# Altium PCB PCB1.PcbDoc
Units mm, origin at the board's own origin, x right, y up, seen from the top; angles counter-clockwise.
Board outline 33.5 x 35.78 mm, 2 copper layers (Top Layer, Bottom Layer); 48 components, 15 nets, 227 pads, 57 vias.
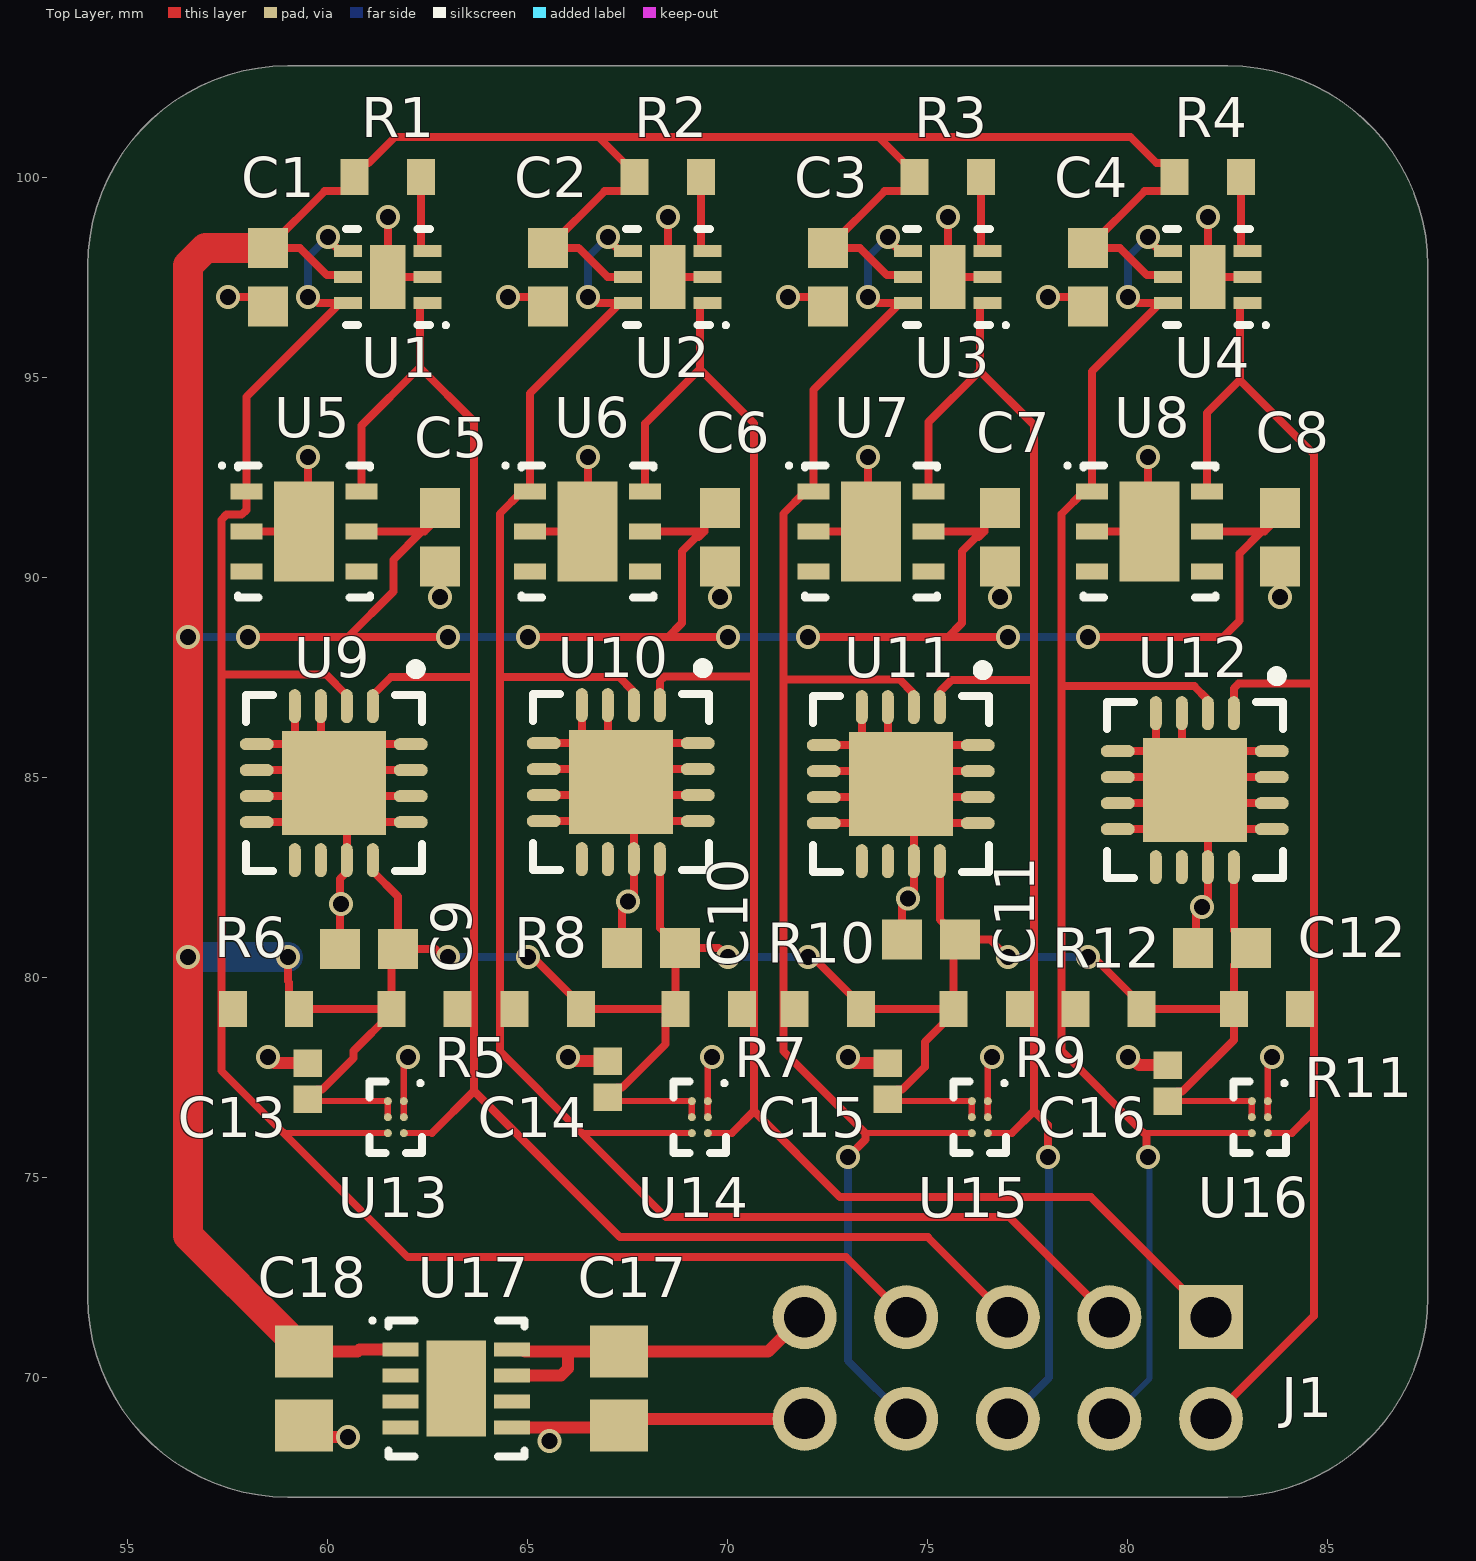
[diagram p0: Top Layer view]
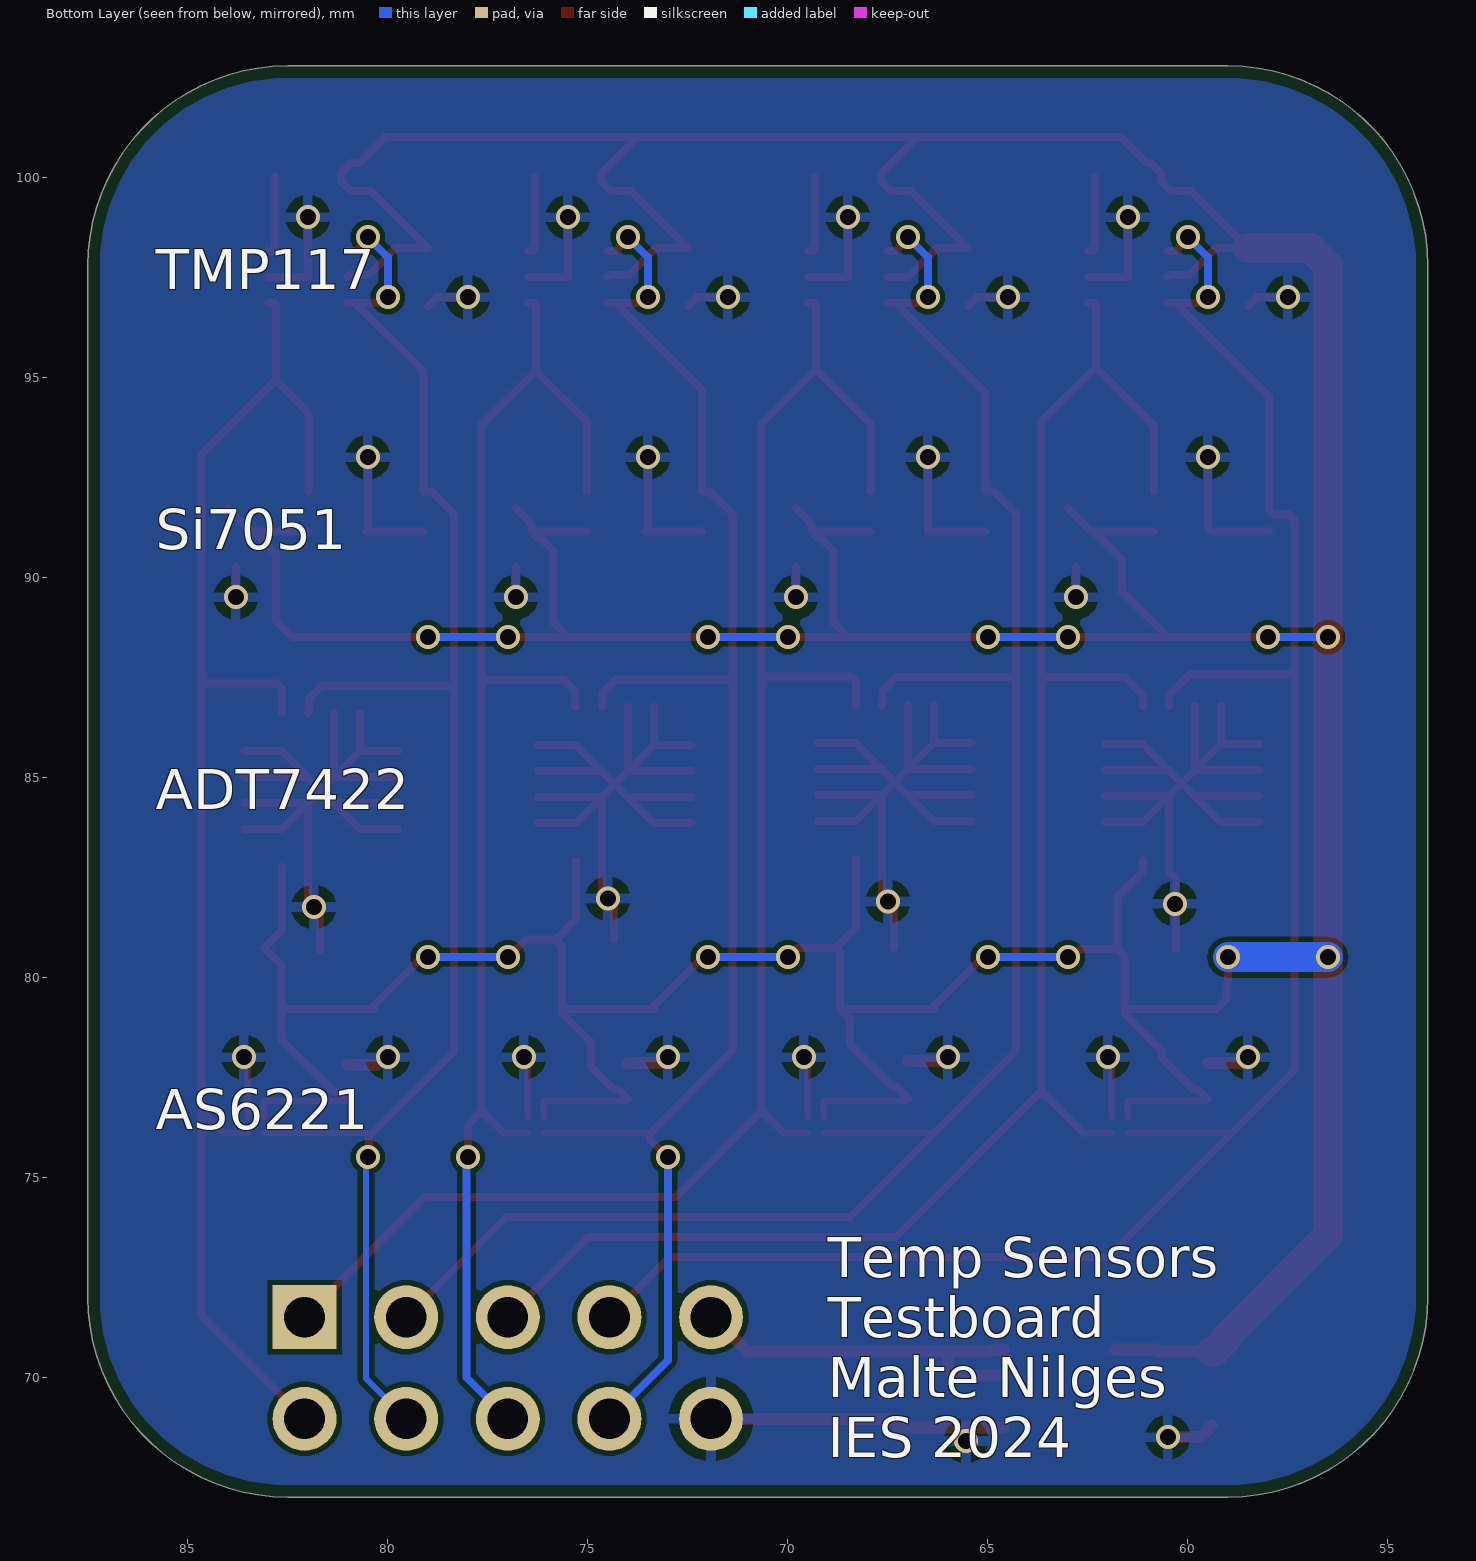
[diagram p1: Bottom Layer view, seen from below]

## Layer stack, top to bottom
Top Solder: solder mask 0.0102, Solder Resist, Dk 3.5
Top Layer: signal copper 0.0356
Dielectric 1: dielectric 0.32, FR-4, Dk 4.8
Bottom Layer: signal copper 0.0356
Bottom Solder: solder mask 0.0102, Solder Resist, Dk 3.5

## Board outline
54,72 54,97.785 cw(c59,97.785) 59,102.785 82.5,102.785 cw(c82.5,97.785) 87.5,97.785 87.5,72 cw(c82.5,72) 82.5,67 59,67 cw(c59,72)

## Design rules (kind name [scope] priority, off if disabled: settings)
BoardOutlineClearance [All] p1: gap=0.3 ignorepadtopadclearanceinfootprint=FALSE
Clearance [All] p1: gap=0.127 ignorepadtopadclearanceinfootprint=FALSE
HoleToHoleClearance [All] p1: gap=0.5 allowstackedmicrovias=TRUE
MinimumSolderMaskSliver [All] p1: minsoldermaskwidth=0.1
PolygonConnect [All] p1: connectstyle=Relief reliefconductorwidth=0.254 reliefentries=4 polygonreliefangle="90 Angle" airgapwidth=0.254
RoutingVias [All] p1: holewidth=0.4 width=0.6 viastyle="Through Hole" minholewidth=0.3 minwidth=0.5 maxholewidth=1 maxwidth=2
SolderMaskExpansion [All] p1: expansion=0.05 istentingtop=FALSE
SupplyNets "Schematic Supply Nets_2" [InNet('GND')] p1: voltage=0.000
SupplyNets "Schematic Supply Nets_1" [InNet('3V3')] p2: voltage=0.000
SupplyNets "Schematic Supply Nets" [InNet('5V')] p3: voltage=0.000
Width [All] p1: maxlimit=2.54 minlimit=0.127 preferedwidth=0.254
28 further rules are at their usual default settings.

## Components (designator, comment, footprint, x,y, rotation, side; value= is the part's Value field where it differs from the comment)
C1 "100nF" CAP_SM0603_YAGEOCC2_N 58.5,97.5 r90 top
C2 "100nF" CAP_SM0603_YAGEOCC2_N 65.5,97.5 r90 top
C3 "100nF" CAP_SM0603_YAGEOCC2_N 72.5,97.5 r90 top
C4 "100nF" CAP_SM0603_YAGEOCC2_N 79,97.5 r90 top
C5 "100nF" CAP_SM0603_YAGEOCC2_N 62.8,91 r90 top
C6 "100nF" CAP_SM0603_YAGEOCC2_N 69.8,91 r90 top
C7 "100nF" CAP_SM0603_YAGEOCC2_N 76.8,91 r90 top
C8 "100nF" CAP_SM0603_YAGEOCC2_N 83.8,91 r90 top
C9 "100nF" CAP_SM0603_YAGEOCC2_N 61.028,80.699 r0 top
C10 "100nF" CAP_SM0603_YAGEOCC2_N 68.076,80.733 r0 top
C11 "100nF" CAP_SM0603_YAGEOCC2_N 75.076,80.938 r0 top
C12 "100nF" CAP_SM0603_YAGEOCC2_N 82.353,80.733 r0 top
C13 "10nF" CAP_SM0402_YAGEOCC2_N 59.5,77.4 r90 top
C14 "10nF" CAP_SM0402_YAGEOCC2_N 67,77.45 r90 top
C15 "10nF" CAP_SM0402_YAGEOCC2_N 74,77.4 r90 top
C16 "10nF" CAP_SM0402_YAGEOCC2_N 81,77.35 r90 top
C17 "1uF" CAP_SM0805_YAGEOCC2_N 67.28,69.714 r90 top
C18 "1uF" CAP_SM0805_YAGEOCC2_N 59.406,69.714 r90 top
J1 "PinHeader_2x5" PinHeader_2x5_2.54mm 82.08,71.5 r270 top
R1 "10K" RES_SM0603_YAGEORC_N 61.5,100 r0 top
R2 "10K" RES_SM0603_YAGEORC_N 68.5,100 r0 top
R3 "10K" RES_SM0603_YAGEORC_N 75.5,100 r0 top
R4 "10K" RES_SM0603_YAGEORC_N 82,100 r0 top
R5 "3K3" RES_SM0603_YAGEORC_N 62.415,79.199 r180 top
R6 "3K3" RES_SM0603_YAGEORC_N 58.454,79.199 r0 top
R7 "3K3" RES_SM0603_YAGEORC_N 69.523,79.199 r180 top
R8 "3K3" RES_SM0603_YAGEORC_N 65.5,79.199 r0 top
R9 "3K3" RES_SM0603_YAGEORC_N 76.472,79.199 r180 top
R10 "3K3" RES_SM0603_YAGEORC_N 72.5,79.199 r0 top
R11 "3K3" RES_SM0603_YAGEORC_N 83.479,79.199 r180 top
R12 "3K3" RES_SM0603_YAGEORC_N 79.521,79.199 r0 top
U1 "TMP117" TMP117(N/M)AIDRV_WSON 61.5,97.5 r180 top
U2 "TMP117" TMP117(N/M)AIDRV_WSON 68.5,97.5 r180 top
U3 "TMP117" TMP117(N/M)AIDRV_WSON 75.5,97.5 r180 top
U4 "TMP117" TMP117(N/M)AIDRV_WSON 82,97.5 r180 top
U5 "SI7051-A20-IMR" SI7050/1/2/3/4/5 59.405,91.139 r0 top
U6 "SI7051-A20-IMR" SI7050/1/2/3/4/5 66.493,91.139 r0 top
U7 "SI7051-A20-IMR" SI7050/1/2/3/4/5 73.581,91.139 r0 top
U8 "SI7051-A20-IMR" SI7050/1/2/3/4/5 80.542,91.139 r0 top
U9 "ADT7422CCPZ-RL7" ADT7422_QFN 60.15,84.85 r270 top
U10 "ADT7422CCPZ-RL7" ADT7422_QFN 67.325,84.875 r270 top
U11 "ADT7422CCPZ-RL7" ADT7422_QFN 74.325,84.825 r270 top
U12 "ADT7422CCPZ-RL7" ADT7422_QFN 81.675,84.675 r270 top
U13 "AS6221" AS6221_BGA 61.7,76.5 r270 top
U14 "AS6221" AS6221_BGA 69.3,76.5 r270 top
U15 "AS6221" AS6221_BGA 76.3,76.5 r270 top
U16 "AS6221" AS6221_BGA 83.3,76.5 r270 top
U17 "TPS78433" TPS784xxxQDRBRQ1_SON 63.216,69.714 r0 top

## Footprints (in the part's own frame and the unit in brackets; to place one, negate y for a bottom-side part, rotate by r counter-clockwise, add the part's x,y. Pads: shape width x height; smd on the part's side, far side on the other; paste and mask are expansions set on the pad)
ADT7422_QFN [mm] "QFN, 16-Leads, Body 4,00x4,00mm, Pitch 0,65mm, Thermal Pad 2,60x2,60mm, IPC Medium Density"
  oval 0.85x0.3 smd: 1(-1.925,0.975) 2(-1.925,0.325) 3(-1.925,-0.325) 4(-1.925,-0.975) 9(1.925,-0.975) 10(1.925,-0.325) 11(1.925,0.325) 12(1.925,0.975)
  oval 0.3x0.85 smd: 5(-0.975,-1.925) 6(-0.325,-1.925) 7(0.325,-1.925) 8(0.975,-1.925) 13(0.975,1.925) 14(0.325,1.925) 15(-0.325,1.925) 16(-0.975,1.925)
  rect 2.6x2.6 smd: 17(0,0)
  silkscreen extent -2.97,-2.2 2.2,2.2, body extent -2.05,-2.05 2.05,2.05, height 0.8
AS6221_BGA [mm] "BGA, 6-Leads, Body 1,02x1,50mmx0,53mm, Pitch 0,40mm"
  round 0.2 smd: A1(-0.4,0.2) A2(0,0.2) A3(0.4,0.2) B1(-0.4,-0.2) B2(0,-0.2) B3(0.4,-0.2)
  silkscreen extent -0.9,-0.66 0.89,0.66, body extent -0.74,-0.51 0.74,0.51, height 0.55
CAP_SM0402_YAGEOCC2_N [mm] "Capacitor, Yageo CC Class2, SM0402, IPC Medium Density"
  rect 0.68x0.72 smd: 1(-0.45,0) 2(0.45,0)
  body extent -0.55,-0.35 0.55,0.35, height 0.6
CAP_SM0603_YAGEOCC2_N [mm] "Capacitor, Yageo CC Class2, SM0603, IPC Medium Density"
  rect 1x1 smd: 1(-0.727,0) 2(0.727,0)
  body extent -0.9,-0.5 0.9,0.5, height 0.9
CAP_SM0805_YAGEOCC2_N [mm] "Capacitor, Yageo CC Class2, SM0805, IPC Medium Density"
  rect 1.3x1.45 smd: 1(-0.927,0) 2(0.927,0)
  body extent -1.1,-0.72 1.1,0.72, height 1.45
PinHeader_2x5_2.54mm [mm]
  rect 1.6x1.6 hole 1.02: 1(0,0)
  round 1.6 hole 1.02: 2(2.54,0) 3(0,-2.54) 4(2.54,-2.54) 5(0,-5.08) 6(2.54,-5.08) 7(0,-7.62) 8(2.54,-7.62) 9(0,-10.16) 10(2.54,-10.16)
RES_SM0603_YAGEORC_N [mm] "Resistor, Yageo RC_L, SM0603, IPC Medium Density"
  rect 0.7x0.9 smd: 1(-0.827,0) 2(0.827,0)
  body extent -0.85,-0.45 0.85,0.45, height 0.55
SI7050/1/2/3/4/5 [mm] "SON, 6-Leads, Body 3,00x3,00mm, Pitch 1,00mm, Thermal Pad 2,50x1,50mm, IPC Medium Density"
  rect 0.8x0.4 smd: 1(-1.44,1) 2(-1.44,0) 3(-1.44,-1) 4(1.44,-1) 5(1.44,0) 6(1.44,1)
  rect 1.5x2.5 smd: 7(0,0)
  silkscreen extent -2.1,-1.65 1.65,1.7, body extent -1.5,-1.5 1.5,1.5, height 0.8
TMP117(N/M)AIDRV_WSON [mm] "SON127P600-8N"
  rect 0.7x0.3 smd: 1(-0.995,0.65) 2(-0.995,0) 3(-0.995,-0.65) 4(0.995,-0.65) 5(0.995,0) 6(0.995,0.65)
  rect 0.89x1.6 smd: 7(0,0)
  silkscreen extent -1.5,-1.2 1.05,1.25, body extent -1.05,-1.05 1.05,1.05, height 0.8
TPS784xxxQDRBRQ1_SON [mm] "SON127P600-8N"
  rect 0.9x0.35 smd: 1(-1.395,0.975) 2(-1.395,0.325) 3(-1.395,-0.325) 4(-1.395,-0.975) 5(1.395,-0.975) 6(1.395,-0.325) 7(1.395,0.325) 8(1.395,0.975)
  rect 1.49x2.4 smd: 9(0,0)
  silkscreen extent -2.15,-1.7 1.7,1.75, body extent -1.55,-1.55 1.55,1.55, height 1

## Part data
C1 C2 C3 C4 C5 C6 C7 C8 C9 C10 C11 C12: library part CC0603KRX7R9BB104, "CAP 100nF SM0603 X7R 50V YAGEO CC2", Manufacturer=Yageo, Package=0603, Supplier Part Number 1=1362556, Tolerance (%)=10, Voltage Rating (Volts)=50, Category=Capacitor, ComponentLink1Description="Manufacturer Website", ComponentLink1URL=http://www.yageo.com, Manufacturer Part Number=CC0603KRX7R9BB104, Supplier 1=Farnell, Supplier 2=Mouser, Supplier Part Number 2=603-CC603KRX7R9BB104
C13 C14 C15 C16: library part CC0402KRX7R9BB103, "CAP 10nF SM0402 X7R 50V YAGEO CC2", Manufacturer=Yageo, Manufacturer Part Number=CC0603KRX7R9BB103, Package=0603, Supplier Part Number 1=3369167, Tolerance (%)=10, Voltage Rating (Volts)=50, Category=Capacitor, ComponentLink1Description="Manufacturer Website", ComponentLink1URL=http://www.yageo.com, Supplier 1=Farnell, Supplier 2=Mouser, Supplier 3=Digi-Key, Supplier Part Number 2=603-CC402KRX7R9BB103, Supplier Part Number 3=311-1349-1-ND
C17 C18: library part CC0805KKX7R8BB105, "CAP 1uF SM0805 X7R 25V YAGEO CC2", Manufacturer=Yageo, Package=0805, Supplier Part Number 1=1458903, Tolerance (%)=10, Voltage Rating (Volts)=25, Category=Capacitor, ComponentLink1Description="Manufacturer Website", ComponentLink1URL=http://www.yageo.com, Manufacturer Part Number=CC0805KKX7R8BB105, Supplier 1=Farnell, Supplier 2=Digi-Key, Supplier 3=Mouser, Supplier Part Number 2=311-1456-1-ND, Supplier Part Number 3=603-CC805KKX7R8BB105
J1: library part PinHeader_2x5_2.54mm, "PinHeader_2x5 2.54mm Pitch"
R1 R2 R3 R4: library part RC0603FR-0710KL, "RES 10K SM0603 YAGEO RC_L", Manufacturer=Yageo, Package=0603, Power (Watts)=0.1, Resistance (Ohms)=10000, Supplier Part Number 1=9238603, Tolerance (%)=1, Category=Resistor, ComponentLink1Description="Manufacturer Website", ComponentLink1URL=http://www.yageo.com, Manufacturer Part Number=RC0603FR-0710KL, Supplier 1=Farnell, Supplier 2=Digi-Key, Supplier Part Number 2=311-10.0KHRCT-ND
R5 R6 R7 R8 R9 R10 R11 R12: library part RC0603FR-073K3L, "RES 3.3K SM0603 YAGEO RC_L", Manufacturer=Yageo, Manufacturer Part Number=RC0603FR-0710KL, Package=0603, Power (Watts)=0.1, Resistance (Ohms)=10000, Supplier Part Number 1=6497630, Supplier Part Number 10=311-3.30KHRCT-ND, Supplier Part Number 11=311-3.30KHRDKR-ND, Supplier Part Number 12=311-3.30KHRTR-ND, Tolerance (%)=1, Category=Resistor, ComponentLink1Description="Manufacturer Website", ComponentLink1URL=http://www.yageo.com, Supplier 1="Future Electronics", Supplier 2=Rs, Supplier 3=Rs, Supplier 4=Rs, Supplier 5=Avnet, Supplier 6="Arrow Electronics", Supplier 7=Farnell, Supplier 8=Farnell, Supplier 9=Mouser, Supplier 10=Digikey, Supplier 11=Digikey, Supplier 12=Digikey, Supplier Part Number 2=1995564, Supplier Part Number 3=1995564P, Supplier Part Number 4=1995563, Supplier Part Number 5=RC0603FR-073K3L, Supplier Part Number 6=RC0603FR-073K3L, Supplier Part Number 7=9238549, Supplier Part Number 8=9238549RL, Supplier Part Number 9=603-RC0603FR-073K3L
U1 U2 U3 U4: library part TMP117NAIDRVR, "TMP117 High-Accuracy, Low-Power, Digital Temperature Sensor, -55°C bis 150°C, 16b 6-WSON (2x2)", Supplier Part Number 1=595-TMP117NAIDRVR, Supplier 1=Mouser, Supplier 2=Digi-Key, Supplier Part Number 2=296-51836-6-ND
U5 U6 U7 U8: "Si7051-A20 Temperature Sensor ±0.1°C maximum accuracy, Digital I2C, -40°C ~ 125°C 14b 6-DFN (3x3)", Supplier Part Number 1=3265013RL, Supplier 1=Farnell, Supplier 2=Mouser, Supplier 3=Digi-Key, Supplier Part Number 2=634-SI7051-A20-IMR, Supplier Part Number 3=336-4764-1-ND
U9 U10 U11 U12: "ADT7422 Temperature Sensor, ±0.1°C Accuracy, 16b, Digital I2C /  -40°C bis 125°C 16-LFCSP-WQ (4x4)", Supplier Part Number 1=584-ADT7422CCPZ-RL7, Supplier 1=Mouser, Supplier 2=Digi-Key, Supplier Part Number 2=505-ADT7422CCPZ-RL7CT-ND
U13 U14 U15 U16: library part AS6221-AWLT-S, "AS6221 Temperature Sensor Digital -40°C ~ 125°C 16b 6-WLCSP (1.5x1.03)", Supplier Part Number 1=985-AS6221-AWLT-S, Supplier 1=Mouser, Supplier 2=Digi-Key, Supplier Part Number 2=4991-AS6221-AWLT-SCT-ND
U17: library part TPS78433QWDRBRQ1, "TPS78433-Q1 3.3V, 300-mA, High-PSRR Low-Dropout Voltage Regulator With High Accuracy and Enable,  8-SON (3x3)", Supplier Part Number 1=595-TPS78433QWDRBRQ1, Supplier 1=Mouser, Supplier 2=Digi-Key, Supplier Part Number 2=296-TPS78433QWDRBRQ1CT-ND

## Via types
v1: diameter 0.6, hole 0.4, Top Layer to Bottom Layer, 57 vias

## Nets (pads, with @x,y where several pads share a name; then routed paths per layer and width w, separated by ;. In a path a pad name is that pad's centre, name@x,y a point inside that pad or via, vN(x,y) a via of type N, cw(c..) or ccw(c..) an arc to the next point about the centre after c; other vN are vias at no path point)
3V3: C1.2 C2.2 C3.2 C4.2 C5.2 C6.2 C7.2 C8.2 C9.2 C10.2 C11.2 C12.2 C13.1 C14.1 C15.1 C16.1 C18.2 R1.1 R2.1 R3.1 R4.1 R5.2 R6.2 R7.2 R8.2 R9.2 R10.2 R11.2 R12.2 U1.5 U2.5 U3.5 U4.5 U5.5 U6.5 U7.5 U8.5 U9.12 U10.12 U11.12 U12.12 U13.B1 U13.B2 U14.B1 U14.B2 U15.B1 U15.B2 U16.B1 U16.B2 U17.1 | length 192.9
  Top Layer w0.152: C13.1 59.55,76.9 U13.B1 U13.B2 ; C14.1@67,76.95 67.05,76.9 U14.B1 U14.B2 ; C15.1 74.05,76.9 U15.B1 U15.B2 ; C16.1 U16.B1 U16.B2
  Top Layer w0.2: v1(58,88.5) 60.5,88.5 ; v1(59,80.5) 59,79.9 59.031,79.869 59.031,79.449 R6.2 R5.2 ; C13.1 59.74,77.19 59.861,77.19 60.646,77.975 60.646,78.157 61.588,79.099 R5.2 ; U1.5 60.455,97.55 59.977,97.55 59.3,98.227 C1.2 59.923,99.65 60.423,99.65 60.673,99.9 R1.1 60.673,100.1 60.923,100.35 61.023,100.35 61.673,101 66.773,101 ; U5.5 62.345,91.139 ; U9.12 61.125,82.65 61.755,82.02 C9.2 ; v1(63,80.5) 62.892,80.5 62.693,80.699 C9.2 ; v1(63,88.5) 60.5,88.5 ; C5.2@63,91.727 62.412,91.139 62.345,91.139 ; v1(65,80.5) 65.077,80.423 65.203,80.423 66.327,79.299 R8.2 R7.2 ; v1(65,88.5) 68.5,88.5 ; C14.1@67,76.95 67,76.98 67.26,77.24 67.361,77.24 68.446,78.325 68.446,78.949 R7.2 ; U2.5 67.495,97.51 66.99,97.51 66.273,98.227 C2.2 66.923,99.65 67.423,99.65 67.673,99.9 R2.1 67.673,100.1 66.773,101 ; U6.5 69.412,91.139 ; U10.12 68.3,81.236 C10.2 ; C6.2 69.412,91.339 69.412,91.139 ; v1(70,80.5) 69.767,80.733 C10.2 ; v1(70,88.5) 68.5,88.5 ; v1(72,80.5) 72.077,80.423 72.203,80.423 73.327,79.299 R10.2 R9.2 ; v1(72,88.5) 75.5,88.5 ; C15.1 74.24,77.19 74.361,77.19 74.925,77.754 74.925,78.379 75.645,79.099 R9.2 ; U3.5 74.455,97.55 73.977,97.55 73.3,98.227 C3.2 73.923,99.65 74.423,99.65 74.673,99.9 R3.1 74.673,100.1 73.773,101 ; U7.5 76.412,91.139 ; U11.12 75.3,81.441 C11.2 ; C7.2 76.412,91.339 76.412,91.139 ; v1(77,80.5) 76.562,80.938 C11.2 ; v1(77,88.5) 75.5,88.5 ; v1(79,80.5) 79.077,80.423 79.224,80.423 80.348,79.299 R12.2 R11.2 ; v1(79,88.5) 82.383,88.5 82.794,88.912 82.794,90.588 83.345,91.139 ; C16.1 81.24,77.14 81.361,77.14 82.652,78.431 R11.2 ; U4.5 80.955,97.55 80.477,97.55 79.8,98.227 C4.2 80.423,99.65 80.923,99.65 81.173,99.9 R4.1 81.173,100.1 80.923,100.35 80.723,100.35 80.073,101 73.773,101 ; U8.5 83.345,91.139 ; U12.12 82.65,81.165 C12.2 ; C12.2 82.652,80.305 R11.2 ; C8.2@84,91.727 83.412,91.139 83.345,91.139 ; 60.5,88.5 61.641,89.641 61.641,90.435 62.345,91.139 ; R5.2 61.588,80.532 C9.2 ; 66.773,101 73.773,101 ; 68.5,88.5 68.853,88.853 68.853,90.647 69.206,91 69.273,91 69.412,91.139 ; R7.2 68.696,80.626 C10.2 ; 75.5,88.5 75.853,88.853 75.853,90.647 76.206,91 76.273,91 76.412,91.139 ; R9.2 75.645,80.78 C11.2
  Top Layer w0.3: C18.2 60.74,70.641 60.788,70.689 U17.1
  Top Layer w0.75: C1.2 56.939,98.227 56.5,97.788 v1(56.5,88.5) v1(56.5,80.5) 56.5,73.547 59.056,70.991 59.056,70.916 59.331,70.641 C18.2
  Bottom Layer w0.2: v1(56.5,88.5) v1(58,88.5) ; v1(63,80.5) v1(65,80.5) ; v1(63,88.5) v1(65,88.5) ; v1(70,80.5) v1(72,80.5) ; v1(70,88.5) v1(72,88.5) ; v1(77,80.5) v1(79,80.5) ; v1(77,88.5) v1(79,88.5)
  Bottom Layer w0.75: v1(56.5,80.5) v1(59,80.5)
5V: C17.2 J1.9 U17.7 U17.8 | length 9.6
  Top Layer w0.3: U17.7 65.824,70.039 66,70.215 66,70.534 66.107,70.641 ; U17.8 64.886,70.689 64.934,70.641 66.107,70.641 ; J1.9 71.87,71.5 71.011,70.641 C17.2 66.107,70.641
GND: C1.1 C2.1 C3.1 C4.1 C5.1 C6.1 C7.1 C8.1 C9.1 C10.1 C11.1 C12.1 C13.2 C14.2 C15.2 C16.2 C17.1 C18.1 J1.10 U1.2 U1.7 U2.2 U2.7 U3.2 U3.7 U4.2 U4.7 U5.2 U5.7 U6.2 U6.7 U7.2 U7.7 U8.2 U8.7 U9.3 U9.4 U9.5 U9.6 U9.7 U9.8 U9.11 U9.13 U9.14 U9.15 U9.16 U9.17 U10.3 U10.4 U10.5 U10.6 U10.7 U10.8 U10.11 U10.13 U10.14 U10.15 U10.16 U10.17 U11.3 U11.4 U11.5 U11.6 U11.7 U11.8 U11.11 U11.13 U11.14 U11.15 U11.16 U11.17 U12.3 U12.4 U12.5 U12.6 U12.7 U12.8 U12.11 U12.13 U12.14 U12.15 U12.16 U12.17 U13.A1 U13.A2 U14.A1 U14.A2 U15.A1 U15.A2 U16.A1 U16.A2 U17.5 | length 137.8
  Top Layer w0.152: U13.A2 U13.A1 61.9,77.779 62,77.879 v1(62,78) ; U14.A2 U14.A1 69.5,77.779 69.6,77.879 v1(69.6,78) ; U15.A2 U15.A1 76.5,77.779 76.6,77.879 v1(76.6,78) ; U16.A2 U16.A1 83.5,77.779 83.6,77.879 v1(83.6,78)
  Top Layer w0.2: v1(57.5,97) 58.273,97 C1.1 ; U5.2 U5.7 59.5,91.234 v1(59.5,93) ; U9.8 59.175,83.875 U9.17@59.825,84.525 ; U9.7 U9.17@59.825,84.525 ; U9.6 U9.17@59.825,85.175 ; U9.5 U9.17@59.175,85.825 ; U9.4 U9.17@59.175,85.825 ; U9.3 U9.17@59.825,85.175 ; C9.1 60.301,82.455 60.475,82.629 U9.11 U9.17@60.475,84.525 ; v1(61.5,99) U1.7 U1.2 ; U9.13 61.125,83.875 U9.17@60.475,84.525 ; U9.14 U9.17@60.475,84.525 ; U9.15 U9.17@60.475,85.175 ; U9.16 61.125,85.825 U9.17@60.475,85.175 ; v1(62.8,89.5) C5.1 ; v1(64.5,97) 65.273,97 C2.1 ; U6.2 U6.7 ; U10.8 66.35,83.9 U10.17@67,84.55 ; U10.7 U10.17@67,84.55 ; U10.6 U10.17@67,85.2 ; U10.5 U10.17@66.35,85.85 ; U10.4 U10.17@66.35,85.85 ; U6.7@66.5,91.234 v1(66.5,93) ; U10.3 U10.17@67,85.2 ; C10.1 67.349,81.74 67.65,82.041 U10.11 U10.17@67.65,84.55 ; v1(68.5,99) U2.7 U2.2 ; U10.13 68.3,83.9 U10.17@67.65,84.55 ; U10.14 U10.17@67.65,84.55 ; U10.15 U10.17@67.65,85.2 ; U10.16 68.3,85.85 U10.17@67.65,85.2 ; v1(69.8,89.5) C6.1 ; v1(71.5,97) 72.273,97 C3.1 ; U7.2 U7.7 ; U11.8 73.35,83.85 U11.17@74,84.5 ; U11.7 U11.17@74,84.5 ; U11.6 U11.17@74,85.15 ; U11.5 U11.17@73.35,85.8 ; U11.4 U11.17@73.35,85.8 ; U7.7@73.5,91.234 v1(73.5,93) ; U11.3 U11.17@74,85.15 ; C11.1 74.349,81.817 74.65,82.118 U11.11 U11.17@74.65,84.5 ; v1(75.5,99) U3.7 U3.2 ; U11.13 75.3,83.85 U11.17@74.65,84.5 ; U11.14 U11.17@74.65,84.5 ; U11.15 U11.17@74.65,85.15 ; U11.16 75.3,85.8 U11.17@74.65,85.15 ; v1(76.8,89.5) C7.1 ; v1(78,97) 78.773,97 C4.1 ; U8.2 U8.7 ; U12.8 80.7,83.7 U12.17@81.35,84.35 ; U12.7 U12.17@81.35,84.35 ; U12.6 U12.17@81.35,85 ; U12.5 U12.17@80.7,85.65 ; U8.7@80.5,91.234 v1(80.5,93) ; U12.4 U12.17@80.7,85.65 ; U12.3 U12.17@81.35,85 ; C12.1@81.699,80.662 81.699,81.604 82,81.905 U12.11 U12.17@82,84.35 ; v1(82,99) U4.7 U4.2 ; U12.13 82.65,83.7 U12.17@82,84.35 ; U12.14 U12.17@82,84.35 ; U12.15 U12.17@82,85 ; U12.16 82.65,85.65 U12.17@82,85 ; v1(83.8,89.5) C8.1 ; U9.17@59.175,85.825 U9.17@59.825,85.175 ; U9.17@59.825,84.525 U9.17 ; U9.17@59.825,85.175 U9.17 ; U9.17 U9.17@60.475,84.525 ; U9.17 U9.17@60.475,85.175 ; U10.17@66.35,85.85 U10.17@67,85.2 ; U10.17@67,84.55 U10.17 ; U10.17@67,85.2 U10.17 ; U10.17 U10.17@67.65,85.2 ; U10.17 U10.17@67.65,84.55 ; U11.17@73.35,85.8 U11.17@74,85.15 ; U11.17@74,84.5 U11.17 ; U11.17@74,85.15 U11.17 ; U11.17 U11.17@74.65,85.15 ; U11.17 U11.17@74.65,84.5 ; U12.17@80.7,85.65 U12.17@81.35,85 ; U12.17@81.35,84.35 U12.17 ; U12.17@81.35,85 U12.17 ; U12.17 U12.17@82,85 ; U12.17 U12.17@82,84.35
  Top Layer w0.3: v1(58.5,78) 58.65,77.85 C13.2 ; C18.1 59.693,68.5 v1(60.5,68.5) ; U17.5 67.232,68.739 C17.1 67.453,68.96 J1.10 ; v1(66,78) 66.081,78 66.181,77.9 C14.2 ; v1(73,78) 73.15,77.85 C15.2 ; v1(80,78) 80.081,78 80.281,77.8 C16.2
  other v1: 65.544,68.406 81.85,81.755 60.324,81.836 67.5,81.89 74.5,81.968
NetR1_2: R1.2 U1.3 | length 2
  Top Layer w0.2: R1.2 62.327,98.2 62.377,98.15 U1.3
NetR2_2: R2.2 U2.3 | length 2
  Top Layer w0.2: R2.2 69.327,98.2 69.377,98.15 U2.3
NetR3_2: R3.2 U3.3 | length 2
  Top Layer w0.2: R3.2 76.327,98.2 76.377,98.15 U3.3
NetR4_2: R4.2 U4.3 | length 2
  Top Layer w0.2: R4.2 82.827,98.2 82.877,98.15 U4.3
SCL1: J1.5 R5.1 U1.1 U5.6 U9.1 U13.A3 | length 45
  Top Layer w0.152: U13.A3 62.6,76.1
  Top Layer w0.2: U5.6 60.845,93.793 62.299,95.246 ; U9.1 61.125,87.05 61.575,87.5 63.654,87.5 ; U1.1 62.349,96.85 62.299,96.8 62.299,95.246 ; 62.6,76.1 63.654,77.154 ; J1.5 75,73.5 67.308,73.5 63.654,77.154 ; 62.299,95.246 63.654,93.891 63.654,87.5 ; 63.654,77.154 63.654,87.5
SCL2: J1.1 R7.1 U2.1 U6.6 U10.1 U14.A3 | length 42.5
  Top Layer w0.152: U14.A3 70.1,76.1
  Top Layer w0.2: U6.6 67.933,93.837 69.299,95.202 ; U10.1 68.3,87.397 68.417,87.514 70.654,87.514 ; U2.1 69.349,96.85 69.299,96.8 69.299,95.202 ; 70.1,76.1 70.654,76.654 ; J1.1 79.08,74.5 72.808,74.5 70.654,76.654 ; 69.299,95.202 70.654,93.847 70.654,87.514 ; 70.654,76.654 70.654,87.514
SCL3: J1.6 R9.1 U3.1 U7.6 U11.1 U15.A3 | length 37
  Top Layer w0.152: U15.A3 77.1,76.1
  Top Layer w0.2: U7.6 75.021,93.881 76.299,95.158 ; U11.1 75.319,86.769 75.319,87.152 75.596,87.429 77.654,87.429 ; U3.1 76.349,96.85 76.299,96.8 76.299,95.158 ; 77.1,76.1 77.654,76.654 ; v1(78,75.5) 78,76.308 77.654,76.654 ; 76.299,95.158 77.654,93.803 77.654,89.379 77.654,87.429 ; 77.654,76.654 77.654,87.429
  Bottom Layer w0.2: J1.6 78.027,69.987 78.027,75.473 v1(78,75.5)
SCL4: J1.2 R11.1 U4.1 U8.6 U12.1 U16.A3 | length 37.1
  Top Layer w0.152: U16.A3 84.1,76.1
  Top Layer w0.2: U8.6 81.982,94.111 82.799,94.928 ; J1.2 84.654,71.534 84.654,76.654 ; U12.1 82.65,87.219 82.767,87.336 84.654,87.336 ; U4.1 82.849,96.85 82.799,96.8 82.799,94.928 ; 84.1,76.1 84.654,76.654 ; 82.799,94.928 84.654,93.073 84.654,89.429 84.654,88.879 84.654,87.336 ; 84.654,76.654 84.654,87.336
SDA1: J1.7 R6.1 U1.4 U1.6 U5.1 U9.2 U13.B3 | length 50
  Top Layer w0.152: 58.9,76.1 U13.B3
  Top Layer w0.2: v1(59.5,97) 59.608,97 59.758,96.85 U1.6@60.305,96.85 ; v1(60,98.5) 60,98.455 60.305,98.15 U1.4 ; U9.2 60.475,87.05 59.959,87.566 57.338,87.566 ; U1.6 U1.6@60.305,96.85 ; J1.7 72.96,73 62,73 58.9,76.1 57.338,77.662 57.338,79.199 57.338,87.566 ; 57.338,87.566 57.338,91.433 57.471,91.566 57.848,91.566 57.965,91.683 U5.1 57.965,94.51 U1.6@60.305,96.85
  Bottom Layer w0.2: v1(59.5,97) 59.5,98 v1(60,98.5)
SDA2: J1.3 R8.1 U2.4 U2.6 U6.1 U10.2 U14.B3 | length 48.1
  Top Layer w0.152: 66.351,76.1 U14.B3
  Top Layer w0.2: v1(66.5,97) 66.608,97 66.758,96.85 U2.6@67.305,96.85 ; v1(67,98.5) 67,98.455 67.305,98.15 U2.4 ; U2.6 U2.6@67.305,96.85 ; U10.2 67.631,86.819 67.631,87.157 67.279,87.509 64.299,87.509 ; J1.3 77.04,74 68.451,74 66.351,76.1 64.299,78.152 64.299,87.509 ; 64.299,87.509 64.299,91.585 64.853,92.139 U6.1 65.053,94.598 U2.6@67.305,96.85
  Bottom Layer w0.2: v1(66.5,97) 66.5,98 v1(67,98.5)
SDA3: J1.8 R10.1 U3.4 U3.6 U7.1 U11.2 U15.B3 | length 40.7
  Top Layer w0.152: 73.439,76.1 U15.B3
  Top Layer w0.2: v1(73,75.5) 73.439,75.939 73.439,76.1 71.387,78.152 71.387,79.199 71.387,87.441 ; v1(73.5,97) 73.608,97 73.758,96.85 U3.6@74.305,96.85 ; v1(74,98.5) 74,98.455 74.305,98.15 U3.4 ; U3.6 U3.6@74.305,96.85 ; U11.2 74.631,86.769 74.631,87.107 74.297,87.441 71.387,87.441 ; 71.387,87.441 71.387,91.585 71.941,92.139 U7.1 72.141,94.686 U3.6@74.305,96.85
  Bottom Layer w0.2: v1(73,75.5) 73,70.42 J1.8 ; v1(73.5,97) 73.5,98 v1(74,98.5)
SDA4: J1.4 R12.1 U4.4 U4.6 U8.1 U12.2 U16.B3 | length 40.6
  Top Layer w0.152: v1@80.471,75.529 v1(80.5,75.5) ; 80.471,76.029 80.4,76.1 U16.B3
  Top Layer w0.2: v1(80,97) 80.108,97 80.258,96.85 U4.6@80.805,96.85 ; 80.4,76.1 78.348,78.152 78.348,87.275 ; v1@80.471,75.529 80.471,76.029 ; v1(80.5,98.5) 80.5,98.455 80.805,98.15 U4.4 ; U4.6 U4.6@80.805,96.85 ; U12.2 81.981,86.619 81.981,86.957 81.663,87.275 78.348,87.275 ; 78.348,87.275 78.348,91.585 78.902,92.139 U8.1 79.102,95.147 U4.6@80.805,96.85
  Bottom Layer w0.152: J1.4 80.543,69.963 80.543,75.457 v1(80.5,75.5)
  Bottom Layer w0.2: v1(80,97) 80,98 v1(80.5,98.5)
pads on no net: U5.3 U5.4 U6.3 U6.4 U7.3 U7.4 U8.3 U8.4 U9.9 U9.10 U10.9 U10.10 U11.9 U11.10 U12.9 U12.10 U17.2 U17.3 U17.4 U17.6 U17.9

## Polygon pours and split planes (outlines as drawn)
GND on Bottom Layer "GND_L02_P000" (solid, pour order 0): 54,102.785 54,67 87.5,67 87.5,102.785

## Silkscreen, mask and mechanical layers (free items; w line width, h text height)
Bottom Overlay:
  text "TMP117" at 85.8,97.2 h1
  text "Si7051" at 85.8,90.7 h1
  text "ADT7422" at 85.8,84.2 h1
  text "AS6221" at 85.8,76.2 h1
  text "Temp Sensors / Testboard / Malte Nilges / IES 2024" at 69,68 h1